# Altium PCB SOP8 flash转接板.PcbDoc
Units mil, origin at the board's own origin, x right, y up, seen from the top; angles counter-clockwise.
Board outline 3558.73 x 2203.73 mil, 2 copper layers (Top Layer, Bottom Layer); 84 components, 8 nets, 672 pads, 336 vias.
Unrouted connection lines stored in the file: 328.
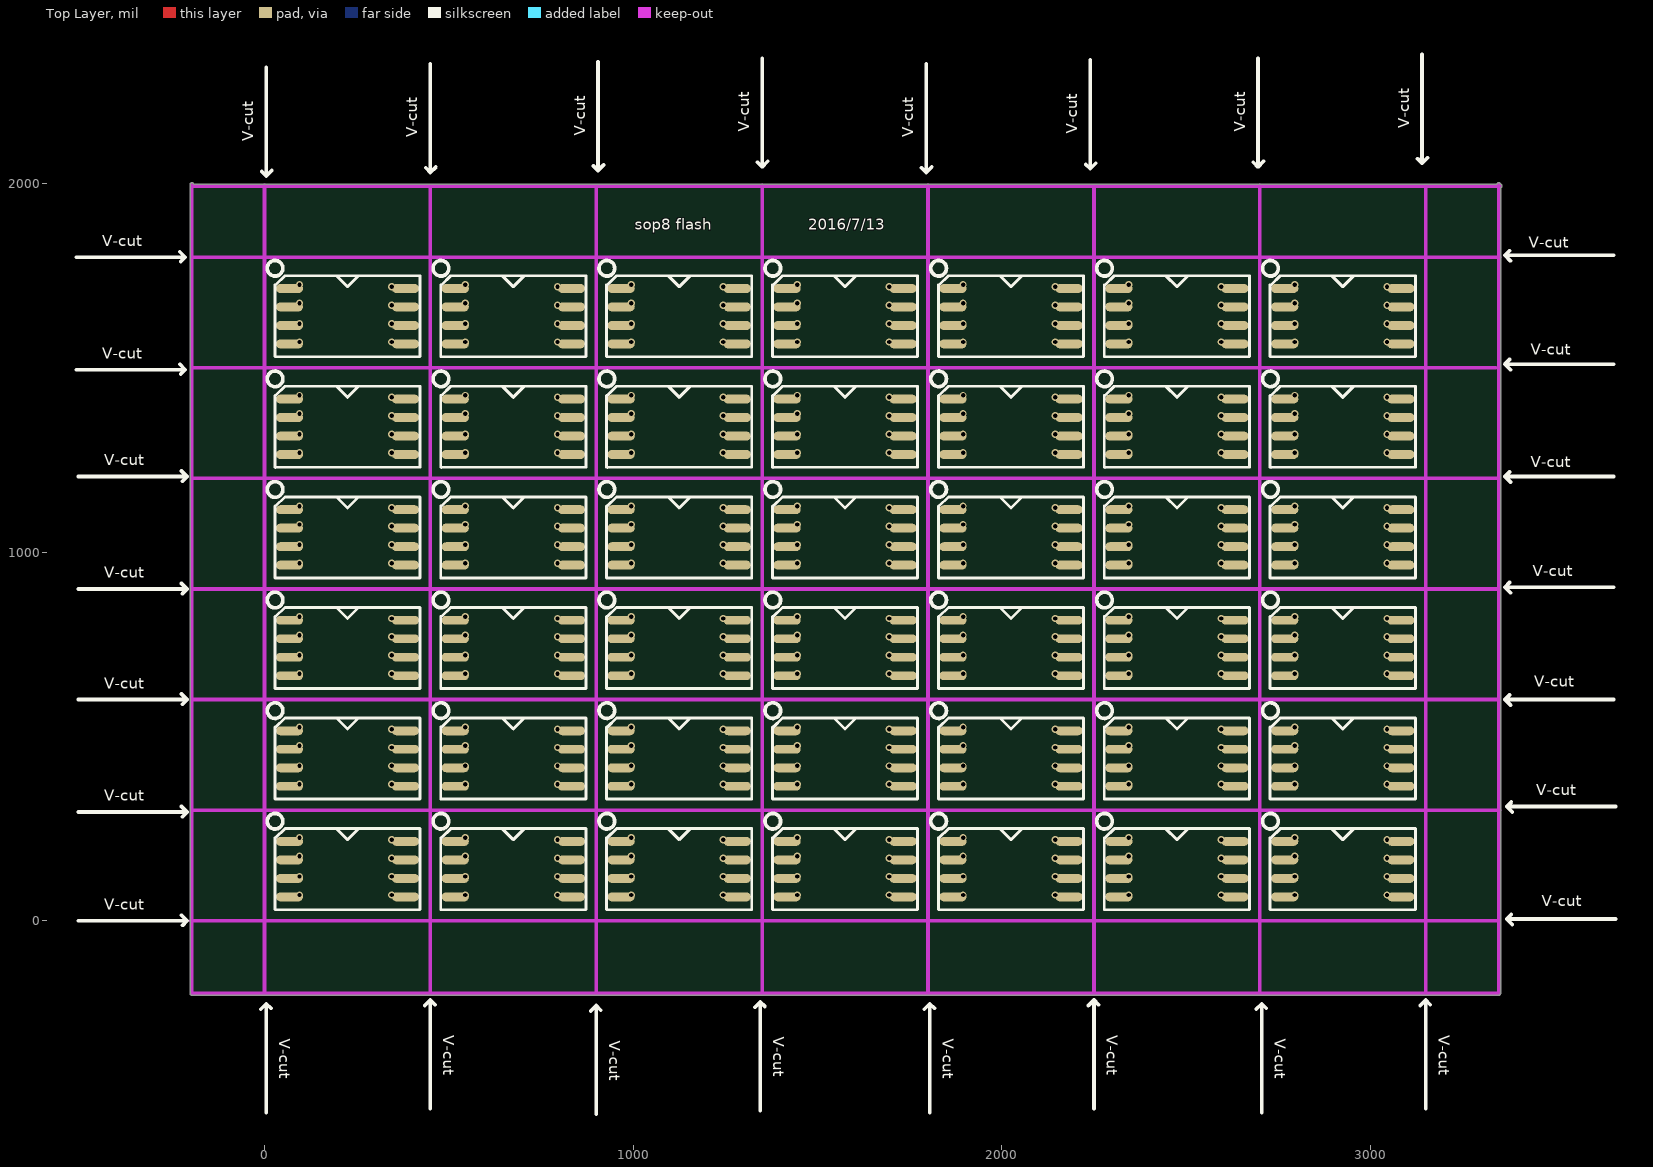
[diagram p0: Top Layer view]
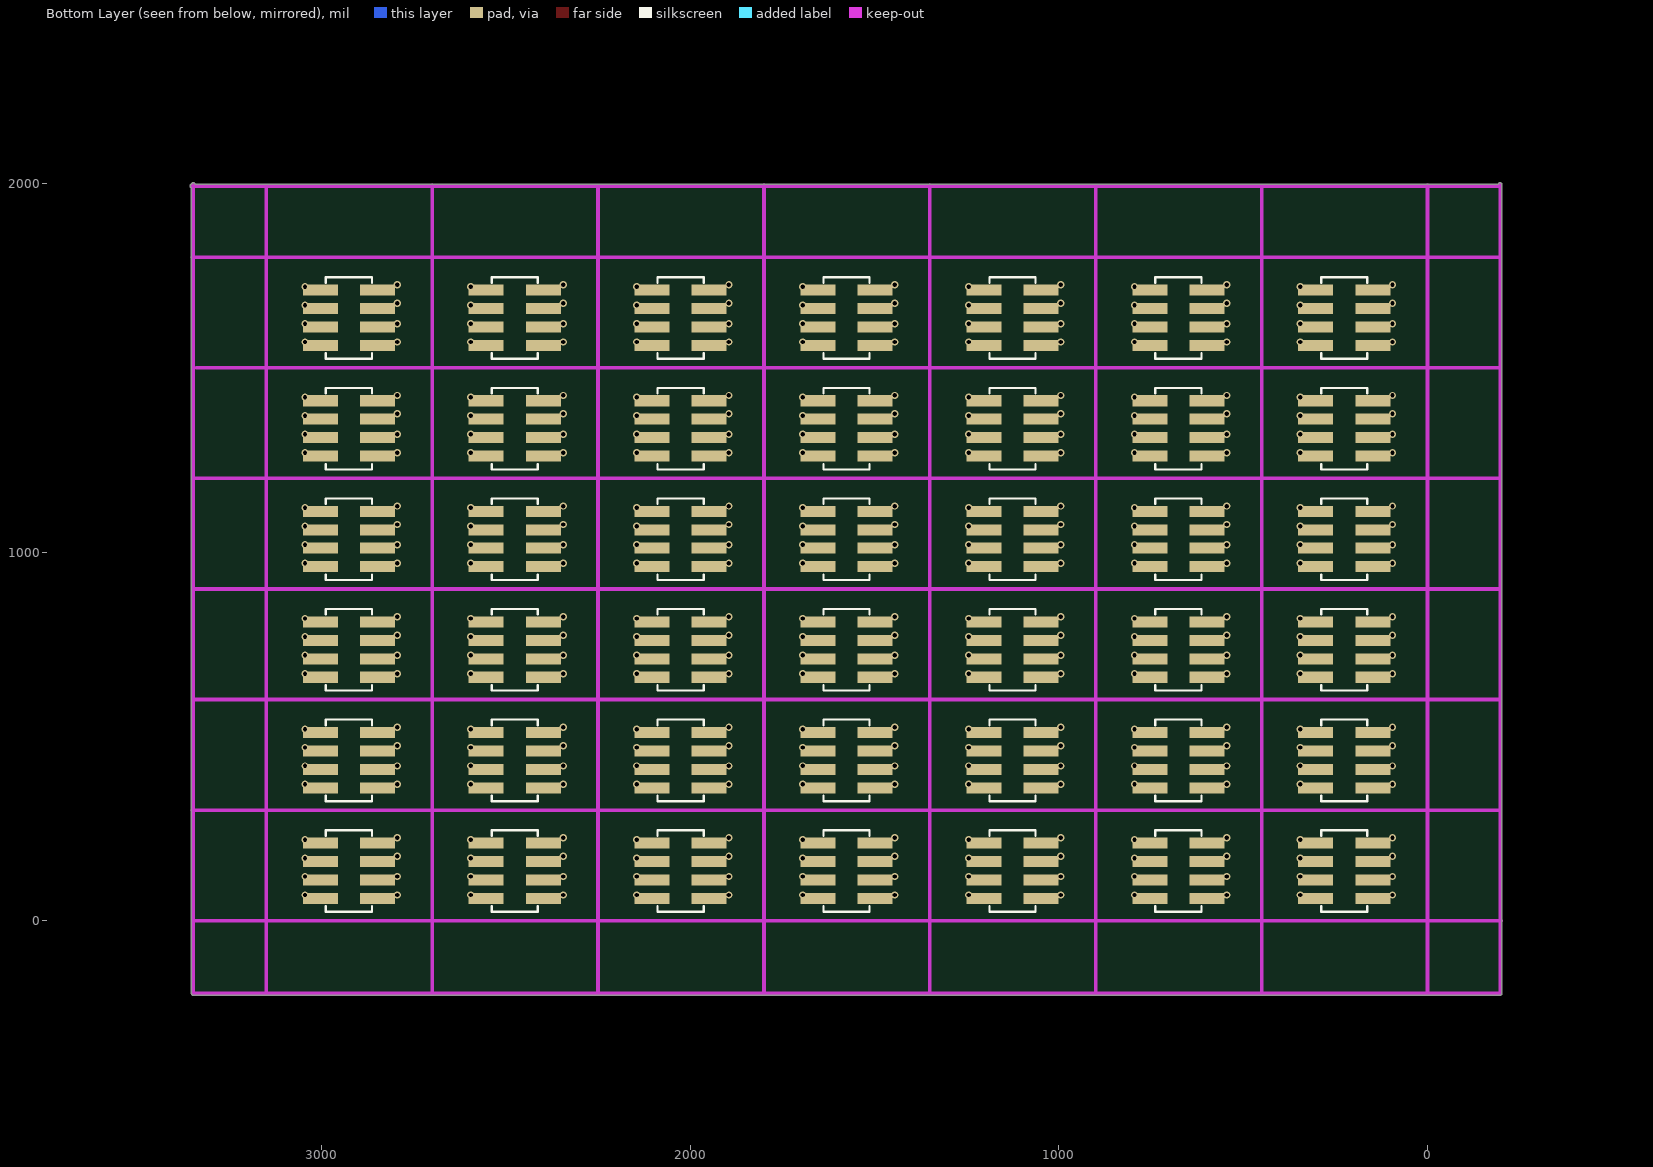
[diagram p1: Bottom Layer view, seen from below]

## Layer stack, top to bottom
Top Layer: signal copper 1.4
Dielectric: dielectric 12.6, FR-4, Dk 4.8
Bottom Layer: signal copper 1.4

## Board outline
-201.87,-196.85 -201.87,1996.85 cw(c-196.85,1996.85) -192.01,1998.16 cw(c-191.85,1993.15) -191.85,1998.16 3343.31,1998.16 cw(c3348.15,1996.85) 3353.03,1998.03 cw(c3351.85,1993.15) 3356.87,1993.15 cw(c3351.85,1993.15) 3353.16,1988.31 3353.16,-196.85 cw(c3348.15,-196.85) 3347.5,-201.82 cw(c3346.85,-196.85) 3346.85,-201.87 -196.85,-201.87 cw(c-196.85,-196.85)

## Design rules (kind name [scope] priority, off if disabled: settings)
Clearance [All] p1: gap=10
PolygonConnect [All] p1: connectstyle=Relief reliefconductorwidth=10 reliefentries=4 polygonreliefangle="90 Angle"
RoutingVias [All] p1: holewidth=28 width=50 viastyle="Through Hole" minholewidth=28 minwidth=50 maxholewidth=28 maxwidth=50
SilkscreenOverComponentPads [All] p1: minsilkscreentomaskgap=10
SolderMaskExpansion [All] p1: expansion=4
Width [All] p1: maxlimit=10 minlimit=10 preferedwidth=10
27 further rules are at their usual default settings.

## Classes and differential pairs
component class "SOP8 flash转接板": P1-2 U1-5

## Components (designator, comment, footprint, x,y, rotation, side; value= is the part's Value field where it differs from the comment)
P1 "Header 4X2" CN_4X2P_1.27MM 225,140 r90 bottom
P1 "Header 4X2" CN_4X2P_1.27MM 675,140 r90 bottom
P1 "Header 4X2" CN_4X2P_1.27MM 1125,140 r90 bottom
P1 "Header 4X2" CN_4X2P_1.27MM 1575,140 r90 bottom
P1 "Header 4X2" CN_4X2P_1.27MM 2025,140 r90 bottom
P1 "Header 4X2" CN_4X2P_1.27MM 2475,140 r90 bottom
P1 "Header 4X2" CN_4X2P_1.27MM 2925,140 r90 bottom
P1 "Header 4X2" CN_4X2P_1.27MM 2925,440 r90 bottom
P1 "Header 4X2" CN_4X2P_1.27MM 2475,440 r90 bottom
P1 "Header 4X2" CN_4X2P_1.27MM 2025,440 r90 bottom
P1 "Header 4X2" CN_4X2P_1.27MM 1575,440 r90 bottom
P1 "Header 4X2" CN_4X2P_1.27MM 1125,440 r90 bottom
P1 "Header 4X2" CN_4X2P_1.27MM 675,440 r90 bottom
P1 "Header 4X2" CN_4X2P_1.27MM 225,440 r90 bottom
P1 "Header 4X2" CN_4X2P_1.27MM 2925,740 r90 bottom
P1 "Header 4X2" CN_4X2P_1.27MM 2475,740 r90 bottom
P1 "Header 4X2" CN_4X2P_1.27MM 2025,740 r90 bottom
P1 "Header 4X2" CN_4X2P_1.27MM 1575,740 r90 bottom
P1 "Header 4X2" CN_4X2P_1.27MM 1125,740 r90 bottom
P1 "Header 4X2" CN_4X2P_1.27MM 675,740 r90 bottom
P1 "Header 4X2" CN_4X2P_1.27MM 225,740 r90 bottom
P1 "Header 4X2" CN_4X2P_1.27MM 2925,1040 r90 bottom
P1 "Header 4X2" CN_4X2P_1.27MM 2475,1040 r90 bottom
P1 "Header 4X2" CN_4X2P_1.27MM 2025,1040 r90 bottom
P1 "Header 4X2" CN_4X2P_1.27MM 1575,1040 r90 bottom
P1 "Header 4X2" CN_4X2P_1.27MM 1125,1040 r90 bottom
P1 "Header 4X2" CN_4X2P_1.27MM 675,1040 r90 bottom
P1 "Header 4X2" CN_4X2P_1.27MM 225,1040 r90 bottom
P1 "Header 4X2" CN_4X2P_1.27MM 2925,1340 r90 bottom
P1 "Header 4X2" CN_4X2P_1.27MM 2475,1340 r90 bottom
P1 "Header 4X2" CN_4X2P_1.27MM 2025,1340 r90 bottom
P1 "Header 4X2" CN_4X2P_1.27MM 1575,1340 r90 bottom
P1 "Header 4X2" CN_4X2P_1.27MM 1125,1340 r90 bottom
P1 "Header 4X2" CN_4X2P_1.27MM 675,1340 r90 bottom
P1 "Header 4X2" CN_4X2P_1.27MM 225,1340 r90 bottom
P1 "Header 4X2" CN_4X2P_1.27MM 2925,1640 r90 bottom
P1 "Header 4X2" CN_4X2P_1.27MM 2475,1640 r90 bottom
P1 "Header 4X2" CN_4X2P_1.27MM 2025,1640 r90 bottom
P1 "Header 4X2" CN_4X2P_1.27MM 1575,1640 r90 bottom
P1 "Header 4X2" CN_4X2P_1.27MM 1125,1640 r90 bottom
P1 "Header 4X2" CN_4X2P_1.27MM 675,1640 r90 bottom
P1 "Header 4X2" CN_4X2P_1.27MM 225,1640 r90 bottom
U1 "W25Q16" SOIC8-50X204 225,140 r270 top
U1 "W25Q16" SOIC8-50X204 675,140 r270 top
U1 "W25Q16" SOIC8-50X204 1125,140 r270 top
U1 "W25Q16" SOIC8-50X204 1575,140 r270 top
U1 "W25Q16" SOIC8-50X204 2025,140 r270 top
U1 "W25Q16" SOIC8-50X204 2475,140 r270 top
U1 "W25Q16" SOIC8-50X204 2925,140 r270 top
U1 "W25Q16" SOIC8-50X204 2925,440 r270 top
U1 "W25Q16" SOIC8-50X204 2475,440 r270 top
U1 "W25Q16" SOIC8-50X204 2025,440 r270 top
U1 "W25Q16" SOIC8-50X204 1575,440 r270 top
U1 "W25Q16" SOIC8-50X204 1125,440 r270 top
U1 "W25Q16" SOIC8-50X204 675,440 r270 top
U1 "W25Q16" SOIC8-50X204 225,440 r270 top
U1 "W25Q16" SOIC8-50X204 2925,740 r270 top
U1 "W25Q16" SOIC8-50X204 2475,740 r270 top
U1 "W25Q16" SOIC8-50X204 2025,740 r270 top
U1 "W25Q16" SOIC8-50X204 1575,740 r270 top
U1 "W25Q16" SOIC8-50X204 1125,740 r270 top
U1 "W25Q16" SOIC8-50X204 675,740 r270 top
U1 "W25Q16" SOIC8-50X204 225,740 r270 top
U1 "W25Q16" SOIC8-50X204 2925,1040 r270 top
U1 "W25Q16" SOIC8-50X204 2475,1040 r270 top
U1 "W25Q16" SOIC8-50X204 2025,1040 r270 top
U1 "W25Q16" SOIC8-50X204 1575,1040 r270 top
U1 "W25Q16" SOIC8-50X204 1125,1040 r270 top
U1 "W25Q16" SOIC8-50X204 675,1040 r270 top
U1 "W25Q16" SOIC8-50X204 225,1040 r270 top
U1 "W25Q16" SOIC8-50X204 2925,1340 r270 top
U1 "W25Q16" SOIC8-50X204 2475,1340 r270 top
U1 "W25Q16" SOIC8-50X204 2025,1340 r270 top
U1 "W25Q16" SOIC8-50X204 1575,1340 r270 top
U1 "W25Q16" SOIC8-50X204 1125,1340 r270 top
U1 "W25Q16" SOIC8-50X204 675,1340 r270 top
U1 "W25Q16" SOIC8-50X204 225,1340 r270 top
U1 "W25Q16" SOIC8-50X204 2925,1640 r270 top
U1 "W25Q16" SOIC8-50X204 2475,1640 r270 top
U1 "W25Q16" SOIC8-50X204 2025,1640 r270 top
U1 "W25Q16" SOIC8-50X204 1575,1640 r270 top
U1 "W25Q16" SOIC8-50X204 1125,1640 r270 top
U1 "W25Q16" SOIC8-50X204 675,1640 r270 top
U1 "W25Q16" SOIC8-50X204 225,1640 r270 top

## Footprints (in the part's own frame and the unit in brackets; to place one, negate y for a bottom-side part, rotate by r counter-clockwise, add the part's x,y. Pads: shape width x height; smd on the part's side, far side on the other; paste and mask are expansions set on the pad)
CN_4X2P_1.27MM [mil]
  rect 30x95 smd: 1(-79.4,-76.5) 2(-29.4,-76.5) 3(20.6,-76.5) 4(70.6,-76.5) 5(70.6,78.5) 6(20.6,78.5) 7(-29.4,78.5) 8(-79.4,78.5)
  silkscreen extent -116,-62 106,64
SOIC8-50X204 [mm] "SOIC8-50X204"
  oval 0.61x1.88 smd: 1(-1.91,-4) 2(-0.64,-4) 3(0.64,-4) 4(1.91,-4) 5(1.91,4) 6(0.64,4) 7(-0.64,4) 8(-1.91,4)
  silkscreen extent -2.79,-5 2.79,5

## Part data
P1 P1 P1 P1 P1 P1 P1 P1 P1 P1 P1 P1 P1 P1 P1 P1 P1 P1 P1 P1 P1 P1 P1 P1 P1 P1 P1 P1 P1 P1 P1 P1 P1 P1 P1 P1 P1 P1 P1 P1 P1 P1: "Header, 4-Pin, Dual row"
U1 U1 U1 U1 U1 U1 U1 U1 U1 U1 U1 U1 U1 U1 U1 U1 U1 U1 U1 U1 U1 U1 U1 U1 U1 U1 U1 U1 U1 U1 U1 U1 U1 U1 U1 U1 U1 U1 U1 U1 U1 U1: library part MX25Lxx

## Via types
v1: diameter 20, hole 12, Top Layer to Bottom Layer, 336 vias

## Nets (pads, with @x,y where several pads share a name; then routed paths per layer and width w, separated by ;. In a path a pad name is that pad's centre, name@x,y a point inside that pad or via, vN(x,y) a via of type N, cw(c..) or ccw(c..) an arc to the next point about the centre after c; other vN are vias at no path point)
PIN1: P1.4 U1.1
  other v1: 95,225 545,225 995,225 1445,225 1895,225 2345,225 2795,225 95,525 545,525 995,525 1445,525 1895,525 2345,525 2795,525 95,825 545,825 995,825 1445,825 1895,825 2345,825 2795,825 95,1125 545,1125 995,1125 1445,1125 1895,1125 2345,1125 2795,1125 95,1425 545,1425 995,1425 1445,1425 1895,1425 2345,1425 2795,1425 95,1725 545,1725 995,1725 1445,1725 1895,1725 2345,1725 2795,1725
PIN2: P1.3 U1.2
  other v1: 95,175 545,175 995,175 1445,175 1895,175 2345,175 2795,175 95,475 545,475 995,475 1445,475 1895,475 2345,475 2795,475 95,775 545,775 995,775 1445,775 1895,775 2345,775 2795,775 95,1075 545,1075 995,1075 1445,1075 1895,1075 2345,1075 2795,1075 95,1375 545,1375 995,1375 1445,1375 1895,1375 2345,1375 2795,1375 95,1675 545,1675 995,1675 1445,1675 1895,1675 2345,1675 2795,1675
PIN3: P1.2 U1.3
  other v1: 95,120 545,120 995,120 1445,120 1895,120 2345,120 2795,120 95,420 545,420 995,420 1445,420 1895,420 2345,420 2795,420 95,720 545,720 995,720 1445,720 1895,720 2345,720 2795,720 95,1020 545,1020 995,1020 1445,1020 1895,1020 2345,1020 2795,1020 95,1320 545,1320 995,1320 1445,1320 1895,1320 2345,1320 2795,1320 95,1620 545,1620 995,1620 1445,1620 1895,1620 2345,1620 2795,1620
PIN4: P1.1 U1.4
  other v1: 95,70 545,70 995,70 1445,70 1895,70 2345,70 2795,70 95,370 545,370 995,370 1445,370 1895,370 2345,370 2795,370 95,670 545,670 995,670 1445,670 1895,670 2345,670 2795,670 95,970 545,970 995,970 1445,970 1895,970 2345,970 2795,970 95,1270 545,1270 995,1270 1445,1270 1895,1270 2345,1270 2795,1270 95,1570 545,1570 995,1570 1445,1570 1895,1570 2345,1570 2795,1570
PIN5: P1.8 U1.5
  other v1: 345,70 795,70 1245,70 1695,70 2145,70 2595,70 3045,70 345,370 795,370 1245,370 1695,370 2145,370 2595,370 3045,370 345,670 795,670 1245,670 1695,670 2145,670 2595,670 3045,670 345,970 795,970 1245,970 1695,970 2145,970 2595,970 3045,970 345,1270 795,1270 1245,1270 1695,1270 2145,1270 2595,1270 3045,1270 345,1570 795,1570 1245,1570 1695,1570 2145,1570 2595,1570 3045,1570
PIN6: P1.7 U1.6
  other v1: 345,120 795,120 1245,120 1695,120 2145,120 2595,120 3045,120 345,420 795,420 1245,420 1695,420 2145,420 2595,420 3045,420 345,720 795,720 1245,720 1695,720 2145,720 2595,720 3045,720 345,1020 795,1020 1245,1020 1695,1020 2145,1020 2595,1020 3045,1020 345,1320 795,1320 1245,1320 1695,1320 2145,1320 2595,1320 3045,1320 345,1620 795,1620 1245,1620 1695,1620 2145,1620 2595,1620 3045,1620
PIN7: P1.6 U1.7
  other v1: 345,170 795,170 1245,170 1695,170 2145,170 2595,170 3045,170 345,470 795,470 1245,470 1695,470 2145,470 2595,470 3045,470 345,770 795,770 1245,770 1695,770 2145,770 2595,770 3045,770 345,1070 795,1070 1245,1070 1695,1070 2145,1070 2595,1070 3045,1070 345,1370 795,1370 1245,1370 1695,1370 2145,1370 2595,1370 3045,1370 345,1670 795,1670 1245,1670 1695,1670 2145,1670 2595,1670 3045,1670
PIN8: P1.5 U1.8
  other v1: 345,220 795,220 1245,220 1695,220 2145,220 2595,220 3045,220 345,520 795,520 1245,520 1695,520 2145,520 2595,520 3045,520 345,820 795,820 1245,820 1695,820 2145,820 2595,820 3045,820 345,1120 795,1120 1245,1120 1695,1120 2145,1120 2595,1120 3045,1120 345,1420 795,1420 1245,1420 1695,1420 2145,1420 2595,1420 3045,1420 345,1720 795,1720 1245,1720 1695,1720 2145,1720 2595,1720 3045,1720

## Keep-outs
Keep-Out Layer:
  lines w10: -200,0 -5,0 ; -196.85,1996.85 -196.85,-196.85 3346.85,-196.85 ; -195,300 0,300 ; -195,900 0,900 ; -195,1200 0,1200 ; -195,1500 0,1500 ; -195,1800 0,1800 ; -191.85,1993.15 3351.85,1993.15 ; -190,600 5,600 ; 0,-190 0,5 ; 0,1995 0,1800 ; 450,-190 450,5 ; 450,1795 450,1990 ; 900,-195 900,0 ; 900,1795 900,1990 ; 1350,-195 1350,0 ; 1350,1995 1350,1800 ; 1800,-190 1800,5 ; 1800,1995 1800,1800 ; 2250,-190 2250,5 ; 2250,1805 2250,1990 ; 2700,-190 2700,5 ; 2700,1995 2700,1800 ; 3145,1500 3340,1500 ; 3150,-190 3150,5 ; 3150,1790 3150,1985 ; 3155,300 3350,300 ; 3155,1800 3350,1800 ; 3345,0 3150,0 ; 3345,600 3150,600 ; 3345,900 3150,900 ; 3345,1200 3150,1200 ; 3348.15,-196.85 3348.15,1996.85 ; 0,300 0,0 450,0 ; 0,300 450,300 ; 0,300 450,300 ; 0,300 0,600 ; 0,600 450,600 ; 0,600 450,600 ; 0,600 0,900 ; 0,900 450,900 ; 0,900 450,900 ; 0,900 0,1200 ; 0,1200 450,1200 ; 0,1200 450,1200 ; 0,1200 0,1500 ; 0,1500 450,1500 ; 0,1500 450,1500 ; 0,1500 0,1800 ; 0,1800 450,1800 ; 450,0 450,300 ; 450,0 900,0 ; 450,0 450,300 ; 450,300 900,300 ; 450,300 450,600 ; 450,300 900,300 ; 450,300 450,600 ; 450,600 900,600 ; 450,600 450,900 ; 450,600 900,600 ; 450,600 450,900 ; 450,900 900,900 ; 450,900 450,1200 ; 450,900 900,900 ; 450,900 450,1200 ; 450,1200 900,1200 ; 450,1200 450,1500 ; 450,1200 900,1200 ; 450,1200 450,1500 ; 450,1500 900,1500 ; 450,1500 450,1800 ; 450,1500 900,1500 ; 450,1500 450,1800 ; 450,1800 900,1800 ; 900,0 900,300 ; 900,0 1350,0 ; 900,0 900,300 ; 900,300 1350,300 ; 900,300 900,600 ; 900,300 1350,300 ; 900,300 900,600 ; 900,600 1350,600 ; 900,600 900,900 ; 900,600 1350,600 ; 900,600 900,900 ; 900,900 1350,900 ; 900,900 900,1200 ; 900,900 1350,900 ; 900,900 900,1200 ; 900,1200 1350,1200 ; 900,1200 900,1500 ; 900,1200 1350,1200 ; 900,1200 900,1500 ; 900,1500 1350,1500 ; 900,1500 900,1800 ; 900,1500 1350,1500 ; 900,1500 900,1800 ; 900,1800 1350,1800 ; 1350,0 1350,300 ; 1350,0 1800,0 ; 1350,0 1350,300 ; 1350,300 1800,300 ; 1350,300 1350,600 ; 1350,300 1800,300 ; 1350,300 1350,600 ; 1350,600 1800,600 ; 1350,600 1350,900 ; 1350,600 1800,600 ; 1350,600 1350,900 ; 1350,900 1800,900 ; 1350,900 1350,1200 ; 1350,900 1800,900 ; 1350,900 1350,1200 ; 1350,1200 1800,1200 ; 1350,1200 1350,1500 ; 1350,1200 1800,1200 ; 1350,1200 1350,1500 ; 1350,1500 1800,1500 ; 1350,1500 1350,1800 ; 1350,1500 1800,1500 ; 1350,1500 1350,1800 ; 1350,1800 1800,1800 ; 1800,0 1800,300 ; 1800,0 2250,0 ; 1800,0 1800,300 ; 1800,300 2250,300 ; 1800,300 1800,600 ; 1800,300 2250,300 ; 1800,300 1800,600 ; 1800,600 2250,600 ; 1800,600 1800,900 ; 1800,600 2250,600 ; 1800,600 1800,900 ; 1800,900 2250,900 ; 1800,900 1800,1200 ; 1800,900 2250,900 ; 1800,900 1800,1200 ; 1800,1200 2250,1200 ; 1800,1200 1800,1500 ; 1800,1200 2250,1200 ; 1800,1200 1800,1500 ; 1800,1500 2250,1500 ; 1800,1500 1800,1800 ; 1800,1500 2250,1500 ; 1800,1500 1800,1800 ; 1800,1800 2250,1800 ; 2250,0 2250,300 ; 2250,0 2700,0 ; 2250,0 2250,300 ; 2250,300 2700,300 ; 2250,300 2250,600 ; 2250,300 2700,300 ; 2250,300 2250,600 ; 2250,600 2700,600 ; 2250,600 2250,900 ; 2250,600 2700,600 ; 2250,600 2250,900 ; 2250,900 2700,900 ; 2250,900 2250,1200 ; 2250,900 2700,900 ; 2250,900 2250,1200 ; 2250,1200 2700,1200 ; 2250,1200 2250,1500 ; 2250,1200 2700,1200 ; 2250,1200 2250,1500 ; 2250,1500 2700,1500 ; 2250,1500 2250,1800 ; 2250,1500 2700,1500 ; 2250,1500 2250,1800 ; 2250,1800 2700,1800 ; 2700,0 2700,300 ; 2700,0 3150,0 ; 2700,0 2700,300 ; 2700,300 3150,300 ; 2700,300 2700,600 ; 2700,300 3150,300 ; 2700,300 2700,600 ; 2700,600 3150,600 ; 2700,600 2700,900 ; 2700,600 3150,600 ; 2700,600 2700,900 ; 2700,900 3150,900 ; 2700,900 2700,1200 ; 2700,900 3150,900 ; 2700,900 2700,1200 ; 2700,1200 3150,1200 ; 2700,1200 2700,1500 ; 2700,1200 3150,1200 ; 2700,1200 2700,1500 ; 2700,1500 3150,1500 ; 2700,1500 2700,1800 ; 2700,1500 3150,1500 ; 2700,1500 2700,1800 ; 2700,1800 3150,1800 3150,1500 ; 3150,0 3150,300 ; 3150,300 3150,600 ; 3150,600 3150,900 ; 3150,900 3150,1200 ; 3150,1200 3150,1500

## Silkscreen, mask and mechanical layers (free items; w line width, h text height)
Top Overlay:
  circle w10: c28.79,270 r21.21
  circle w10: c478.79,270 r21.21
  circle w10: c928.79,270 r21.21
  circle w10: c1378.79,270 r21.21
  circle w10: c1828.79,270 r21.21
  circle w10: c2278.79,270 r21.21
  circle w10: c2728.79,270 r21.21
  circle w10: c2728.79,570 r21.21
  circle w10: c2278.79,570 r21.21
  circle w10: c1828.79,570 r21.21
  circle w10: c1378.79,570 r21.21
  circle w10: c928.79,570 r21.21
  circle w10: c478.79,570 r21.21
  circle w10: c28.79,570 r21.21
  circle w10: c2728.79,870 r21.21
  circle w10: c2278.79,870 r21.21
  circle w10: c1828.79,870 r21.21
  circle w10: c1378.79,870 r21.21
  circle w10: c928.79,870 r21.21
  circle w10: c478.79,870 r21.21
  circle w10: c28.79,870 r21.21
  circle w10: c2728.79,1170 r21.21
  circle w10: c2278.79,1170 r21.21
  circle w10: c1828.79,1170 r21.21
  circle w10: c1378.79,1170 r21.21
  circle w10: c928.79,1170 r21.21
  circle w10: c478.79,1170 r21.21
  circle w10: c28.79,1170 r21.21
  circle w10: c2728.79,1470 r21.21
  circle w10: c2278.79,1470 r21.21
  circle w10: c1828.79,1470 r21.21
  circle w10: c1378.79,1470 r21.21
  circle w10: c928.79,1470 r21.21
  circle w10: c478.79,1470 r21.21
  circle w10: c28.79,1470 r21.21
  circle w10: c2728.79,1770 r21.21
  circle w10: c2278.79,1770 r21.21
  circle w10: c1828.79,1770 r21.21
  circle w10: c1378.79,1770 r21.21
  circle w10: c928.79,1770 r21.21
  circle w10: c478.79,1770 r21.21
  circle w10: c28.79,1770 r21.21
  lines w10: -510,1495 -215,1495 ; -510,1800 -215,1800 ; -505,0 -210,0 ; -505,295 -210,295 ; -505,600 -210,600 ; -505,900 -210,900 ; -505,1205 -210,1205 ; -230,1510 -215,1495 ; -230,1815 -215,1800 ; -227.5,1482.5 -215,1495 ; -227.5,1787.5 -215,1800 ; -225,15 -210,0 ; -225,310 -210,295 ; -225,615 -210,600 ; -225,915 -210,900 ; -225,1220 -210,1205 ; -222.5,-12.5 -210,0 ; -222.5,282.5 -210,295 ; -222.5,587.5 -210,600 ; -222.5,887.5 -210,900 ; -222.5,1192.5 -210,1205 ; -10,-240 5,-225 ; -7.5,2032.5 5,2020 ; 5,-520 5,-225 ; 5,2315 5,2020 ; 17.5,-237.5 5,-225 ; 20,2035 5,2020 ; 435,-230 450,-215 ; 437.5,2042.5 450,2030 ; 450,-510 450,-215 ; 450,2325 450,2030 ; 462.5,-227.5 450,-215 ; 465,2045 450,2030 ; 885,-245 900,-230 ; 892.5,2047.5 905,2035 ; 900,-525 900,-230 ; 905,2330 905,2035 ; 912.5,-242.5 900,-230 ; 920,2050 905,2035 ; 1330,-235 1345,-220 ; 1337.5,2057.5 1350,2045 ; 1345,-515 1345,-220 ; 1350,2340 1350,2045 ; 1357.5,-232.5 1345,-220 ; 1365,2060 1350,2045 ; 1782.5,2042.5 1795,2030 ; 1790,-240 1805,-225 ; 1795,2325 1795,2030 ; 1805,-520 1805,-225 ; 1810,2045 1795,2030 ; 1817.5,-237.5 1805,-225 ; 2227.5,2052.5 2240,2040 ; 2235,-230 2250,-215 ; 2240,2335 2240,2040 ; 2250,-510 2250,-215 ; 2255,2055 2240,2040 ; 2262.5,-227.5 2250,-215 ; 2682.5,2057.5 2695,2045 ; 2690,-240 2705,-225 ; 2695,2340 2695,2045 ; 2705,-520 2705,-225 ; 2710,2060 2695,2045 ; 2717.5,-237.5 2705,-225 ; 3127.5,2067.5 3140,2055 ; 3135,-230 3150,-215 ; 3140,2350 3140,2055 ; 3150,-510 3150,-215 ; 3155,2070 3140,2055 ; 3162.5,-227.5 3150,-215 ; 3377.5,612.5 3365,600 ; 3377.5,917.5 3365,905 ; 3377.5,1217.5 3365,1205 ; 3377.5,1522.5 3365,1510 ; 3377.5,1817.5 3365,1805 ; 3380,585 3365,600 ; 3380,890 3365,905 ; 3380,1190 3365,1205 ; 3380,1495 3365,1510 ; 3380,1790 3365,1805 ; 3382.5,17.5 3370,5 ; 3382.5,322.5 3370,310 ; 3385,-10 3370,5 ; 3385,295 3370,310 ; 3660,600 3365,600 ; 3660,905 3365,905 ; 3660,1205 3365,1205 ; 3660,1510 3365,1510 ; 3660,1805 3365,1805 ; 3665,5 3370,5 ; 3665,310 3370,310
  text "V-cut" at 3105,2150 h30 r90
  text "V-cut" at 1315,2140 h30 r90
  text "V-cut" at 2660,2140 h30 r90
  text "V-cut" at 2205,2135 h30 r90
  text "V-cut" at 870,2130 h30 r90
  text "V-cut" at 415,2125 h30 r90
  text "V-cut" at 1760,2125 h30 r90
  text "V-cut" at -30,2115 h30 r90
  text "sop8 flash" at 1005,1875 h30
  text "2016/7/13" at 1475,1875 h30
  text "V-cut" at -440,1830 h30
  text "V-cut" at 3430,1825 h30
  text "V-cut" at 3435,1535 h30
  text "V-cut" at -440,1525 h30
  text "V-cut" at -435,1235 h30
  text "V-cut" at 3435,1230 h30
  text "V-cut" at 3440,935 h30
  text "V-cut" at -435,930 h30
  text "V-cut" at 3445,635 h30
  text "V-cut" at -435,630 h30
  text "V-cut" at 3450,340 h30
  text "V-cut" at -435,325 h30
  text "V-cut" at 3465,40 h30
  text "V-cut" at -435,30 h30
  text "V-cut" at 485,-310 h30 r270
  text "V-cut" at 2285,-310 h30 r270
  text "V-cut" at 3185,-310 h30 r270
  text "V-cut" at 1380,-315 h30 r270
  text "V-cut" at 40,-320 h30 r270
  text "V-cut" at 1840,-320 h30 r270
  text "V-cut" at 2740,-320 h30 r270
  text "V-cut" at 935,-325 h30 r270